# EAGLE board Bat Necklace (EAGLE 7.0.0)
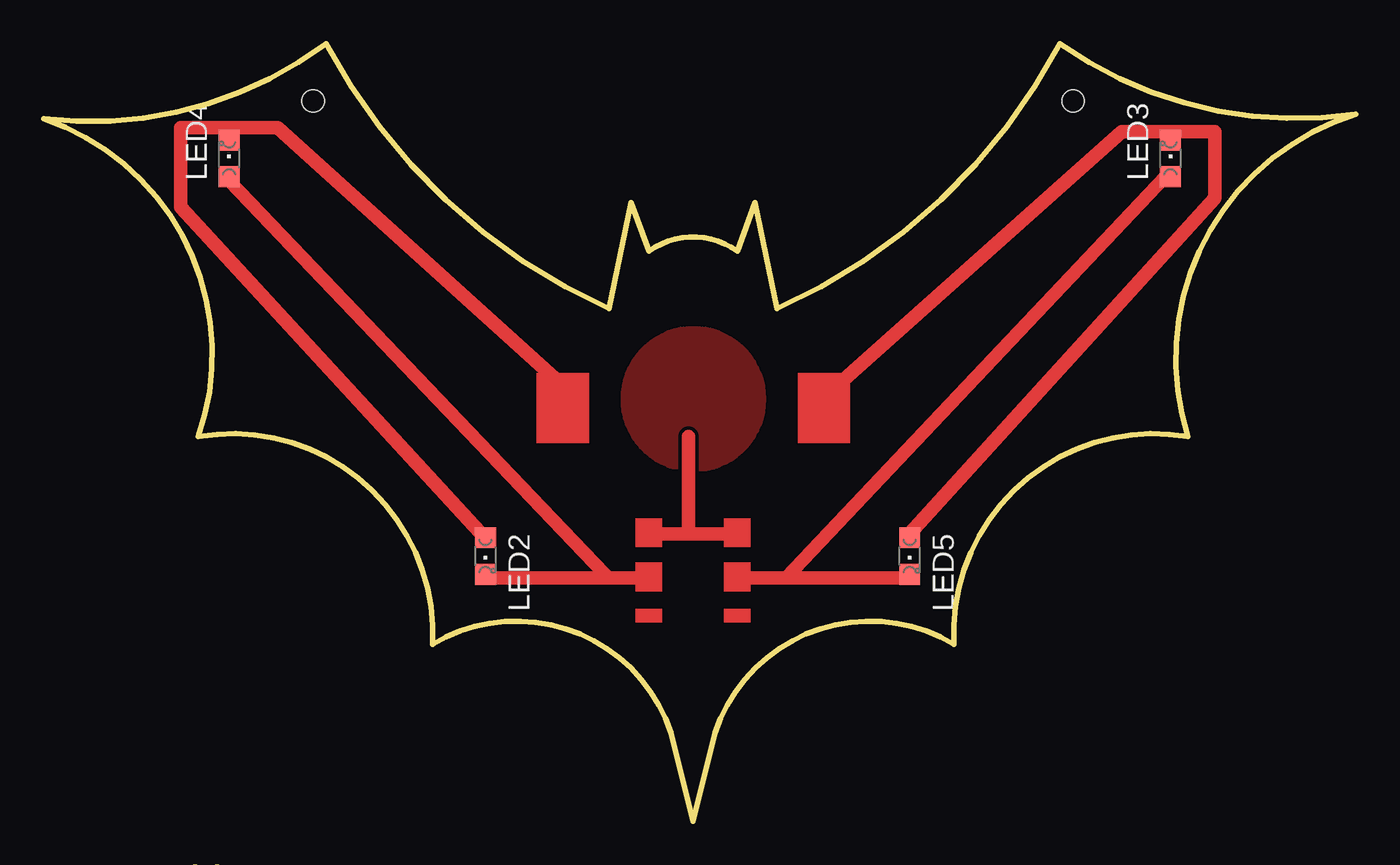
[diagram p0: board, top side]
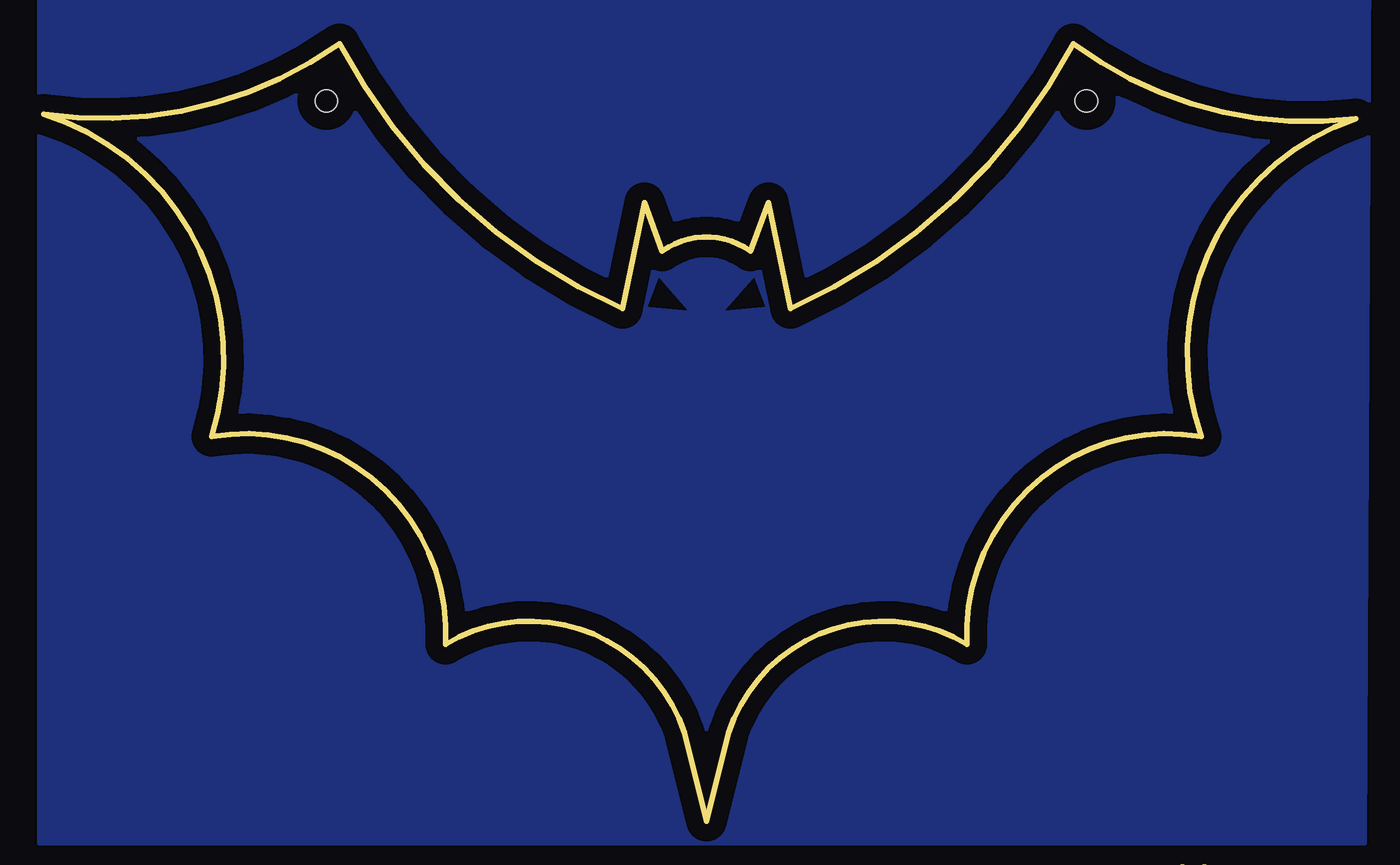
[diagram p1: board, bottom side, seen from below]

Size 75.44 x 44.7 mm. Coordinates in mm from the lower left corner, seen from the top.
Outline: 58.42,44.7 arc-38 42.16,29.46 40.89,35.56 39.88,32.77 arc71 34.8,32.77 33.78,35.56 32.51,29.46 arc-38 16.26,44.7 arc-44 0,40.39 arc-91 8.89,22.1 arc-103 22.35,10.16 arc-103 36.07,5.08 37.34,0 38.61,5.08 arc-103 52.32,10.16 arc-103 65.79,22.1 arc-91 75.44,40.64 arc-44 58.42,44.7
Copper layers (1*16): Top 0.035mm / dielectric 1.5mm / Bottom 0.035mm
Design rules "default": minimum track width 10mil, minimum drill 24mil, track to track 8mil, track to pad 8mil, pad to pad 8mil, via to via 8mil, smd to smd 8mil, copper to edge 40mil, drill to drill 8mil, minimum pad ring 10mil, minimum via ring 8mil, stop-mask expansion 4mil, vias tented up to drill 0mil, thermal gap 10mil
Holes 1.27 mm at 15.49,41.4 59.18,41.4

## Footprints (pad centres in the part's own frame; a part is rotated, then mirrored left to right if it is on the bottom)
CHIPLED_0805 = smd 1.2 x 1.2: A 0,-1.05; C 0,1.05

## Placement (x,y rotation side)
LED2  [CHIPLED_0805]  25.4,15.24 180 top
LED3  [CHIPLED_0805]  64.77,38.1 0 top
LED4  [CHIPLED_0805]  10.67,38.1 0 top
LED5  [CHIPLED_0805]  49.78,15.24 180 top

## Library data of the parts
LED2-LED5 = led

## Tracks (layer width: path | path; a pad name or v marks a point on that pad's centre or on a via)
N$1
  Top 0.762: 45.47,24.89 61.98,39.62 67.31,39.62 67.31,35.81 49.78,16.51
N$2
  Top 0.762: 40.13,16.51 37.08,16.51 | 37.08,16.51 34.8,16.51 | 37.08,16.51 37.08,22.1
N$3
  Top 0.762: 64.52,37.08 42.67,13.97
N$4
  Top 0.762: 49.78,13.97 40.13,13.97
N$5
  Top 0.762: 34.29,13.97 25.65,13.97
N$6
  Top 0.762: 29.72,25.15 13.46,39.88 7.87,39.88 7.87,35.31 25.4,16.26
N$7
  Top 0.762: 10.67,36.83 32.26,14.22
S$1
  pour Top: 33.35,24.26 arc90 37.35,20.26 arc90 41.35,24.26 arc90 37.35,28.26 arc90
S$3
  pour Bottom: -0.76,49.53 -0.51,-1.27 75.69,-1.27 75.69,49.53 37.59,49.53 37.34,29.46 38.1,29.21 40.13,31.5 40.89,29.46 38.1,29.21 36.58,29.21 33.78,29.46 34.54,31.5 36.58,29.21 37.34,29.21 37.59,49.53
(copper drawn outside any net)
  shapes: Top area x8

## Text on the board
Dimension: Bat Necklace | V1